# EAGLE board LS (EAGLE 8.6.0)
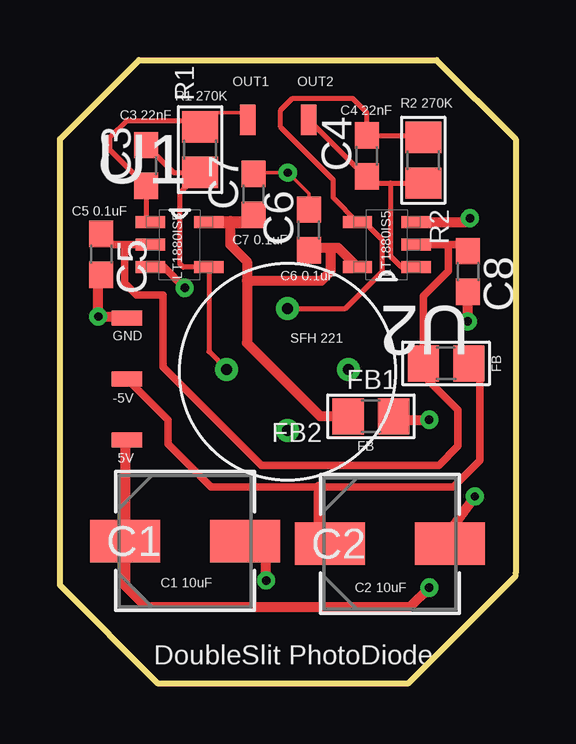
[diagram p0: board, top side]
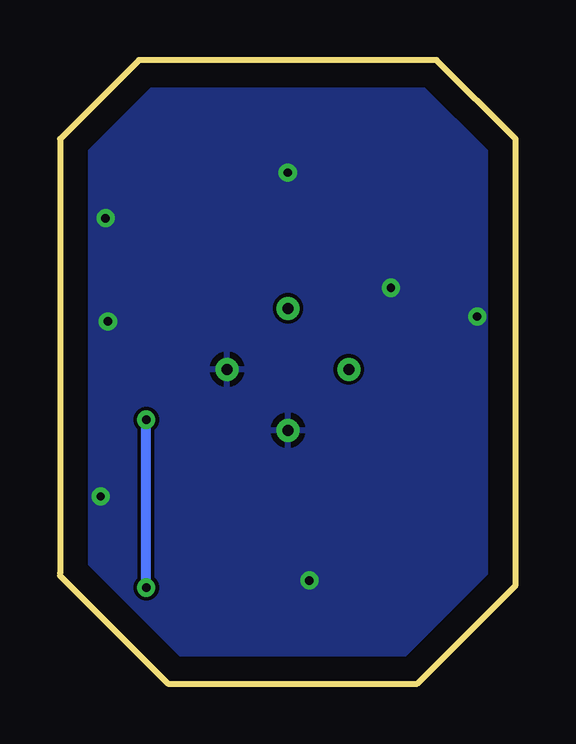
[diagram p1: board, bottom side, seen from below]

Size 19 x 26 mm. Coordinates in mm from the lower left corner, seen from the top.
Outline: 19,4.5 19,4.6 19,22.7 15.7,26 3.3,26 0,22.7 0,4.1 4.1,0 14.5,0 19,4.5
Copper layers (1*16): Top 0.035mm / dielectric 1.5mm / Bottom 0.035mm
Design rules "default": minimum track width 6mil, minimum drill 0.35mm, track to track 6mil, track to pad 6mil, pad to pad 6mil, via to via 6mil, smd to smd 6mil, copper to edge 40mil, drill to drill 6mil, minimum pad ring 10mil, minimum via ring 8mil, stop-mask expansion 4mil, vias tented up to drill 0mil, thermal gap 10mil

## Footprints (pad centres in the part's own frame; a part is rotated, then mirrored left to right if it is on the bottom)
CAP_EEFC_C = smd 2.921 x 1.778: 1 -2.502,0; 2 2.502,0
C0603 = smd 1.1 x 1: 1 -0.85,0; 2 0.85,0
0805 = smd 1.3 x 1.5: 1 -0.95,0; 2 0.95,0
22-28-8020 = smd 0.635 x 1.27: 1 1.27,0; 2 -1.27,0
SOT95P280X100-5N = smd 1.219 x 0.508: 1 -1.219,0.94; 2 -1.219,0; 3 -1.219,-0.94; 4 1.219,-0.94; 5 1.219,0.94
SFH_221 = drill 0.455: ANODE_A -2.54,0; ANODE_B 0,2.54; CATHODE 0,-2.54; METAL_CASE 2.54,0
PINHD_SMD-3 = smd 0.635 x 1.27: 1 -2.54,0; 2 0,0; 3 2.54,0

## Placement (x,y rotation side)
C1  EEEFC1V100R  [CAP_EEFC_C]  5.22,5.94 0 top
C2  EEEFC1V100R  [CAP_EEFC_C]  13.76,5.83 0 top
C3  22nF  [C0603]  3.6,21.6 90 top
C4  22nF  [C0603]  12.8,22 90 top
C5  0.1uF  [C0603]  1.72,17.9 270 top
C6  0.1uF  [C0603]  10.38,18.91 90 top
C7  0.1uF  [C0603]  8.08,20.4 90 top
C8  0.1uF  [C0603]  17.02,17.18 270 top
FB1  MMZ2012Y152B  [0805]  16.1,13.35 180 top
FB2  MMZ2012Y152B  [0805]  12.97,11.14 180 top
J2  22-28-8020  [22-28-8020]  9.1,23.5 180 top
R1  270k  [0805]  5.84,22.26 90 top
R2  270k  [0805]  15.15,21.82 270 top
U1  LT1880IS5TRMPBF  [SOT95P280X100-5N]  4.99,18.3 0 top
U2  LT1880IS5TRMPBF  [SOT95P280X100-5N]  13.63,18.3 180 top
U$1  SFH221  [SFH_221]  9.49,13.1 0 top
U$2  PINHD_SMD-3  [PINHD_SMD-3]  2.8,12.7 90 top

## Library data of the parts
C1 C2 = 10uFElectrolyticSMD; MANUFACTURER_PART_NUMBER: EEEFC1V100R; VENDOR: Panasonic
C3-C8 = rcl; SPICEPREFIX: C
FB1 FB2 R1 R2 = microbuilder
J2 = PinHD-2; MANUFACTURER_PART_NUMBER: 22288020; VENDOR: Molex Connector Corporation
U1 U2 = LT1880IS5; DESCRIPTION: Ic Opamp Pico/In Rr/Out Tsot23-5 - Lt1880is5#Trmpbf; DIGI-KEY_PART_NUMBER: LT1880IS5#TRMPBFCT-ND; DIGI-KEY_PURCHASE_URL: https://www.digikey.com/product-detail/en/linear-technology-analog-devices/LT1880IS5-TRMPBF/LT1880IS5-TRMPBFCT-ND/890504?WT.z_cid=ref_snapeda&utm_source=snapeda&utm_medium=aggregator&utm_campaign=buynow; MF: Linear Technology; MP: LT1880IS5#TRMPBF; PACKAGE: TSOT-23 Linear Technology
U$1 = SFH221
U$2 = PINHD_SMD-3

## Nets
5V: C1.1 FB2.1 U$2.1
-5V: C2.1 FB1.1 U$2.2
GND_ANALOG: C1.2 C2.2 C5.2 C6.2 C7.2 C8.2 U1.3 U2.3 U$1.CATHODE U$1.METAL_CASE U$2.3
N$1: C4.1 J2.2 R2.2 U2.1
N$11: C4.2 R2.1 U2.4 U$1.ANODE_B
N$14: C3.1 J2.1 R1.2 U1.1
N$17: C3.2 R1.1 U1.4 U$1.ANODE_A
V+(5V): C6.1 C7.1 FB2.2 U1.5 U2.5
V-(-5V): C5.1 C8.1 FB1.2 U1.2 U2.2

## Tracks (layer width: path | path; a pad name or v marks a point on that pad's centre or on a via)
5V  (via drill 0.35)
  Top 0.406: U$2.1 2.72,10.08 C1.1 2.72,4.08 3.6,3.2 14.6,3.2 v15.4,4 | FB2.1 14.06,11 v15.4,11
  Bottom 0.406: v15.4,4 v15.4,11
-5V
  Top 0.152: C2.1 10.6,5.19 | FB1.1 17.2,13.7
  Top 0.305: 17.5,13.6 17.5,9.3 16.4,8.2 10.8,8.2 6.3,8.2 4.5,10 4.5,11 U$2.2
  Top 0.406: FB1.1 17.5,13.6 | C2.1 10.8,6.29 10.8,8.2
GND_ANALOG  (via drill 0.35)
  Top 0.152: C7.2 8.33,21.3 v9.5,21.3 10.38,20.42 C6.2
  Top 0.305: v5.2,16.5 4.34,17.36 U1.3
  Top 0.406: U$2.3 2.74,15.3 v1.6,15.3 1.6,16.93 C5.2 | v8.6,4.3 8.6,5.7 8.36,5.94 C1.2 | v17.3,7.8 16.26,6.36 C2.2 | v17,15.1 17.02,15.12 C8.2 | U2.3 16.94,19.24 v17.1,19.4
  pour Bottom: 3.3,26 15.7,26 19,22.7 19,4.5 14.5,0 4.1,0 4,0.1 0,4.1 0,22.7
N$1
  Top 0.2: U2.1 14.24,17.36 13.8,17.8 13.8,20.87 | C4.1 12.72,21.15 10.5,23.37
  Top 0.203: C4.1 13.08,20.87 13.8,20.87 R2.2
  Top 0.305: 10.5,23.37 J2.2
N$11
  Top 0.2: U$1.ANODE_B 11.91,15.64 13.45,17.18 13.45,18.5 12.71,19.24 U2.4 11.4,20.25 11.4,21 9.2,23.2 9.2,23.9 9.7,24.4 12.2,24.4
  Top 0.203: R2.1 15.07,22.85 C4.2 12.8,23.8 12.2,24.4
N$14
  Top 0.152: R1.2 5.6,23.47 5.3,23.81 7.52,23.81 J2.1
  Top 0.203: U1.1 3.6,19.41 C3.1 2.1,22.25 2.1,22.8 2.77,23.47 5.6,23.47
N$17
  Top 0.203: U$1.ANODE_A 6.21,13.84 U1.4 5.14,17.36 5,17.5 5,20.47 R1.1 4.74,21.31 C3.2
V+(5V)
  Top 0.152: 7.98,19.61 C7.1 | 10.68,18.16 C6.1
  Top 0.406: 7.8,16.8 7.8,14.2 10.86,11.14 FB2.2 | 7.8,16.8 10.9,16.8 11.3,17.2 11.3,18.16 | 7.1,19.24 7.1,18.3 7.8,17.6 7.8,16.8 | U2.5 11.61,18.16 11.3,18.16 | 11.3,18.16 10.68,18.16
  Top 0.508: U1.5 7.1,19.24 7.77,19.24 C7.1
V-(-5V)
  Top 0.152: 1.77,18.7 C5.1 | 14.9,14 FB1.2
  Top 0.305: 15.15,12.85 16.6,11.4 16.6,9.9 15.8,9.1 8.4,9.1 4.3,13.2 4.3,16.2 3.2,16.2 2.8,16.6 2.7,16.7 2.7,18.3 | FB1.2 15.15,16.15 16.2,17.2 16.2,18.3 | U2.2 16.2,18.3 | 16.2,18.3 16.75,18.3 | U1.2 2.7,18.3 | 2.7,18.3 2.17,18.3 C5.1
  Top 0.406: 15.15,12.85 FB1.2 | 16.75,18.3 C8.1

## Text on the board
tPlace: OUT1 | OUT2 | C3 22nF | R1 270K | C4 22nF | R2 270K | C5 0.1uF | C7 0.1uF | LT1880IS5 | C6 0.1uF | LT1880IS5 | GND | SFH 221 | FB | -5V | FB | 5V | C1 10uF | C2 10uF | DoubleSlit PhotoDiode